# EAGLE board EyeTron (EAGLE 9.5.1)
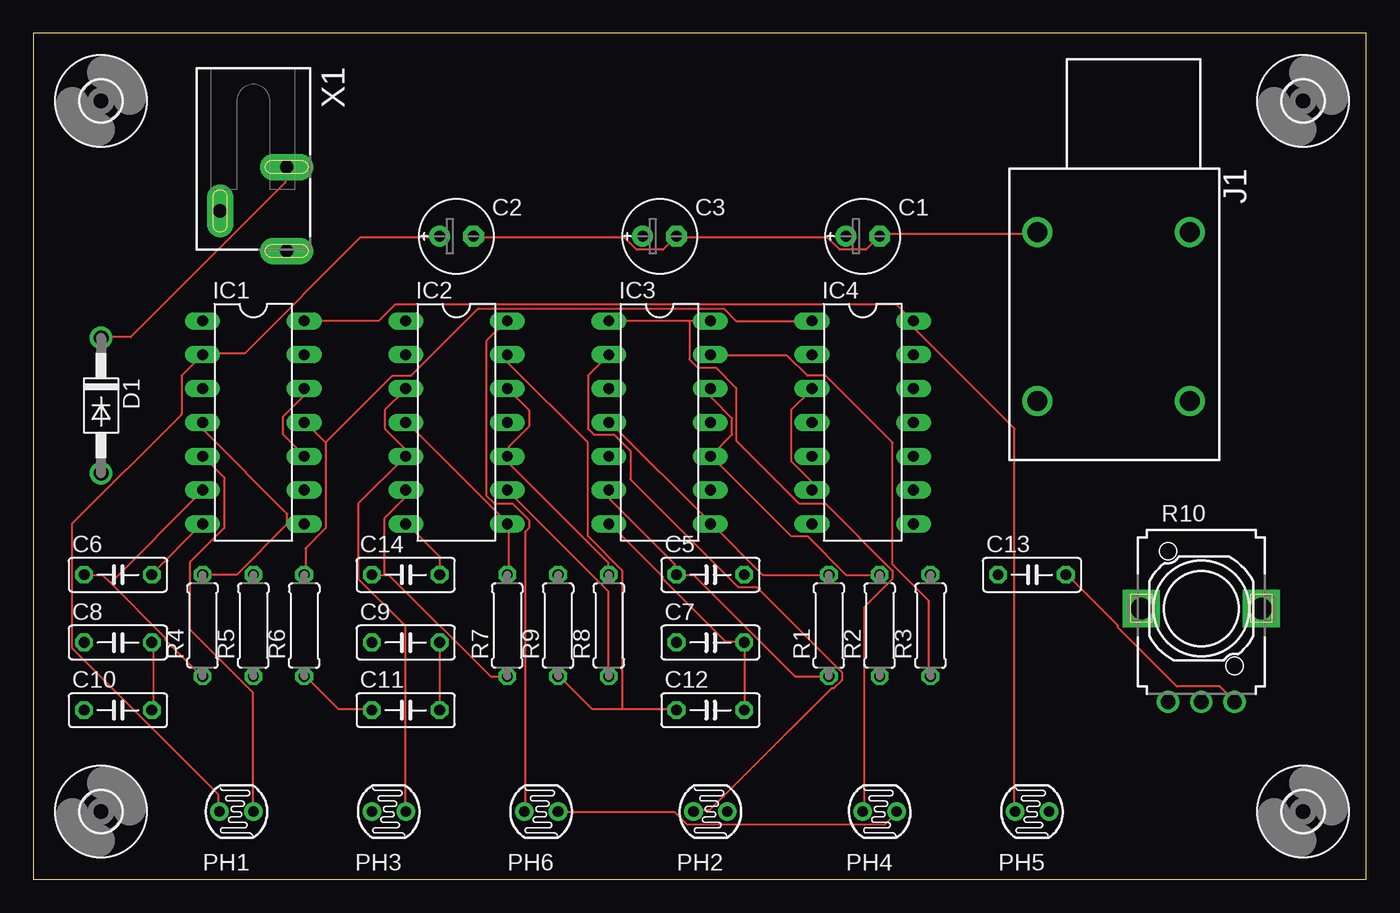
[diagram p0: board, top side]
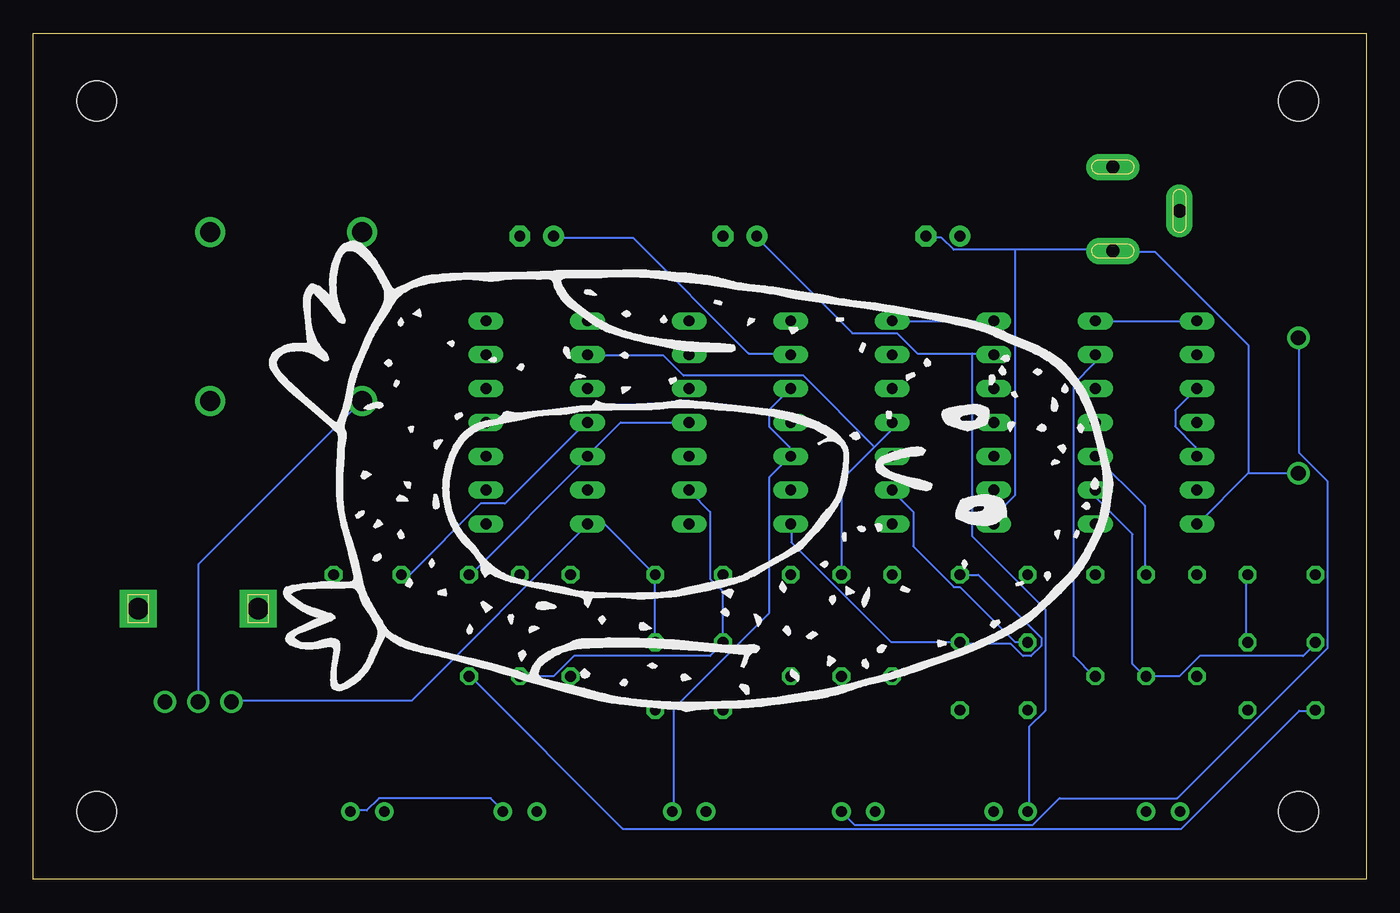
[diagram p1: board, bottom side, seen from below]

Size 100 x 63.49 mm. Coordinates in mm from the lower left corner, seen from the top.
Outline: 0,0 100,0 100,63.49 0,63.49 0,0
Copper layers (1*16): Top 0.035mm / dielectric 1.5mm / Bottom 0.035mm
Design rules "default": minimum track width 6mil, minimum drill 0.35mm, track to track 6mil, track to pad 6mil, pad to pad 6mil, via to via 6mil, smd to smd 6mil, copper to edge 40mil, drill to drill 6mil, minimum pad ring 10mil, minimum via ring 8mil, stop-mask expansion 4mil, vias tented up to drill 0mil, thermal gap 10mil

## Footprints (pad centres in the part's own frame; a part is rotated, then mirrored left to right if it is on the bottom)
E2,5-6E = drill 0.813 pad 1.575: + -1.27,0 | drill 0.813 pad 1.575 octagon: - 1.27,0
C050-025X075 = drill 0.813 octagon: 1 -2.54,0; 2 2.54,0
DO41-10 = drill 1.118: A 5.08,0; C -5.08,0
3,0 = hole 3: 0,0
DIL14 = drill 0.813 long: 1 -7.62,-3.81; 2 -5.08,-3.81; 3 -2.54,-3.81; 4 0,-3.81; 5 2.54,-3.81; 6 5.08,-3.81; 7 7.62,-3.81; 8 7.62,3.81; 9 5.08,3.81; 10 2.54,3.81; 11 0,3.81; 12 -2.54,3.81; 13 -5.08,3.81; 14 -7.62,3.81
NEUTRIK-NRJ4HM-1 = drill 1.5: S 7.23,4.75; SN -4.2,4.75; T 7.23,17.45; TN -4.2,17.45
VT900 = drill 0.8 pad 1.4: 1 -1.27,0; 2 1.27,0
0207/7 = drill 0.813 octagon: 1 -3.81,0; 2 3.81,0
EVUFXL = drill 1.1 pad 1.676: 1 -2.5,-7; 2 0,-7; 3 2.5,-7 | drill 1.6 pad 2.8 square: M1 4.5,0; M2 -4.5,0
SCD-014-A = drill 1 pad 2 long: 1 -2.5,13.8; 2 -2.5,7.5; 3 2.5,10.8

## Placement (x,y rotation side)
C1  100uf  [E2,5-6E]  62.23,48.26 0 top
C2  100uf  [E2,5-6E]  31.75,48.26 0 top
C3  100uf  [E2,5-6E]  46.99,48.26 0 top
C5  10uf  [C050-025X075]  50.8,22.86 0 top
C6  10uf  [C050-025X075]  6.35,22.86 0 top
C7  1uf  [C050-025X075]  50.8,17.78 0 top
C8  1uf  [C050-025X075]  6.35,17.78 0 top
C9  1uf  [C050-025X075]  27.94,17.78 0 top
C10  0.1uf  [C050-025X075]  6.35,12.7 0 top
C11  0.1uf  [C050-025X075]  27.94,12.7 0 top
C12  0.1uf  [C050-025X075]  50.8,12.7 0 top
C13  0.1uf  [C050-025X075]  74.93,22.86 0 top
C14  10uf  [C050-025X075]  27.94,22.86 0 top
D1  1N4001  [DO41-10]  5.08,35.56 270 top
H1  MOUNT-HOLE3.0  [3,0]  5.08,58.42 0 top
H2  MOUNT-HOLE3.0  [3,0]  5.08,5.08 0 top
H3  MOUNT-HOLE3.0  [3,0]  95.25,58.42 0 top
H4  MOUNT-HOLE3.0  [3,0]  95.25,5.08 0 top
IC1  4093N  [DIL14]  16.51,34.29 270 top
IC2  4093N  [DIL14]  31.75,34.29 270 top
IC3  4093N  [DIL14]  46.99,34.29 270 top
IC4  4077N  [DIL14]  62.23,34.29 270 top
J1  [NEUTRIK-NRJ4HM-1]  82.55,53.34 180 top
PH1  [VT900]  15.24,5.08 0 top
PH2  [VT900]  50.8,5.08 0 top
PH3  [VT900]  26.67,5.08 0 top
PH4  [VT900]  63.5,5.08 0 top
PH5  [VT900]  74.93,5.08 0 top
PH6  [VT900]  38.1,5.08 0 top
R1  22k  [0207/7]  59.69,19.05 90 top
R2  22k  [0207/7]  63.5,19.05 90 top
R3  22k  [0207/7]  67.31,19.05 90 top
R4  22k  [0207/7]  12.7,19.05 90 top
R5  22k  [0207/7]  16.51,19.05 90 top
R6  22k  [0207/7]  20.32,19.05 90 top
R7  22k  [0207/7]  35.56,19.05 90 top
R8  22k  [0207/7]  43.18,19.05 90 top
R9  22k  [0207/7]  39.37,19.05 90 top
R10  [EVUFXL]  87.63,20.32 0 top
X1  [SCD-014-A]  16.51,60.96 180 top

## Library data of the parts
C1-C3 C5-C14 = rcl; SPICEPREFIX: C
D1 = diode
H1-H4 = holes
IC1 IC2 IC4 = 40xx
IC3 = 40xx; SPICEPREFIX: J
J1 = Audio Jacks 0.25 inch
PH1-PH6 = photo-elements
R1-R9 = rcl; SPICEPREFIX: R
R10 = pot
X1 = con-shiua-chyuan; OC_FARNELL: unknown; OC_NEWARK: unknown

## Nets
N$1: IC1.11 IC4.1 R6.2
N$2: IC1.10 IC1.12 R5.2
N$3: IC1.4 IC1.8 R4.2
N$4: IC1.3 IC1.5 PH1.2
N$5: IC2.3 IC2.5 PH3.2
N$6: IC2.4 IC2.8 R7.2
N$7: IC2.10 IC2.12 R8.2
N$8: IC2.11 IC4.2 R9.2
N$9: IC4.3 IC4.6
N$10: IC3.3 IC3.5 PH2.2
N$11: IC3.4 IC3.8 R1.2
N$12: IC3.10 IC3.12 R2.2
N$13: IC3.11 IC4.5 R3.2
N$14: C1.+ IC3.2 PH2.1
N$15: C2.+ IC1.2 PH1.1
N$16: C3.+ IC2.2 PH3.1
N$17: C5.1 IC3.6 R1.1
N$19: C7.1 IC3.9 R2.1
N$20: IC3.1 IC3.14 PH4.1
N$21: C10.1 IC3.13 R3.1
N$22: IC1.1 IC1.14 IC4.14 PH5.1
N$23: C6.1 IC1.6 R4.1
N$24: C8.1 IC1.9 R5.1
N$25: C11.1 IC1.13 R6.1
N$26: C14.1 IC2.6 R7.1
N$27: C9.1 IC2.9 R8.1
N$28: C12.1 IC2.13 R9.1
N$29: IC2.1 IC2.14 PH6.1
N$30: D1.C PH4.2 PH5.2 PH6.2 X1.2
N$31: C13.1 IC4.4
N$32: C13.2 R10.3
N$33: J1.T R10.2
N$34: C1.- C2.- C3.- C5.2 C6.2 C7.2 C8.2 C9.2 C10.2 C11.2 C12.2 C14.2 D1.A IC1.7 IC2.7 IC3.7 IC4.7 J1.S R10.1 X1.1

## Tracks (layer width: path | path; a pad name or v marks a point on that pad's centre or on a via)
N$1
  Top 0.152: 21.95,32.77 21.95,26.36 20.42,24.84 20.42,22.86 R6.2 | 21.95,32.77 20.42,34.29 IC1.11 | IC4.1 52.73,41.91 51.82,42.82 33.38,42.82 28.35,37.8 26.98,37.8 21.95,32.77
N$2
  Top 0.152: IC1.12 20.27,36.73 20.27,36.27 18.75,34.75 18.75,33.38 20.27,31.85 IC1.10
  Bottom 0.152: IC1.10 16.61,28.04 16.61,22.86 R5.2
N$3
  Top 0.152: R4.2 15.24,22.86 19.05,26.67 | 19.05,26.67 IC1.8 20.27,26.67 | 19.05,26.67 19.05,27.43 12.8,33.68 12.8,34.29 IC1.4
N$4
  Top 0.152: PH1.2 16.46,5.18 16.46,14.02 11.73,18.75 11.73,23.77 14.33,26.36 14.33,30.18 12.8,31.7 IC1.5
  Bottom 0.152: IC1.3 14.33,35.2 14.33,33.98 12.8,32.46 12.8,31.85 IC1.5
N$5
  Top 0.152: IC2.3 27.89,36.73 26.36,35.2 26.36,33.83 27.89,32.31 27.89,31.85 IC2.5 24.38,28.19 24.38,22.55 27.89,19.05 27.89,5.18 PH3.2
N$6
  Top 0.152: 35.66,26.67 35.66,22.86 R7.2 | 35.66,26.67 28.04,34.29 IC2.4 | 35.66,26.67 IC2.8
N$7
  Top 0.152: IC2.12 37.19,35.2 37.19,33.98 35.66,32.46 35.66,31.85 IC2.10 35.66,31.7 35.66,31.24 43.13,23.77 43.13,22.86 R8.2
N$8
  Bottom 0.152: 36.88,32.46 39.32,30.02 39.32,22.86 R9.2 | 36.88,32.46 35.66,33.68 35.66,34.29 IC2.11 | 36.88,32.46 42.22,37.8 51.21,37.8 52.73,39.32 58.37,39.32 IC4.2
N$9
  Top 0.152: IC4.6 58.37,29.26 58.37,29.87 56.84,31.39 56.84,35.2 58.37,36.73 IC4.3
N$10
  Bottom 0.152: IC3.3 44.81,35.2 44.81,33.98 43.28,32.46 43.28,31.85 IC3.5 43.28,31.7 44.81,30.18 44.81,19.96 51.97,12.8 51.97,5.18 PH2.2
N$11
  Top 0.152: 50.9,26.67 43.28,34.29 IC3.4 | R1.2 54.71,22.86 50.9,26.67 | 50.9,26.67 IC3.8
N$12
  Top 0.152: R2.2 60.96,22.86 58.06,25.76 56.84,25.76 50.9,31.7 IC3.10 52.43,33.38 52.43,34.59 50.9,36.12 50.9,36.73 IC3.12
N$13
  Bottom 0.152: R3.2 67.21,22.86 58.37,31.7 IC4.5 58.37,31.85 55.93,34.29 IC3.11
N$14
  Top 0.152: IC3.2 41.6,37.8 41.6,33.83 42.06,33.38 43.59,33.38 44.81,32.16 44.81,30.02 52.88,21.95 54.25,21.95 60.66,15.54 60.66,14.94 60.05,14.33 59.89,14.33 50.75,5.18 49.53,5.18 PH2.1
  Bottom 0.152: IC3.2 43.28,39.47 46.33,39.47 55.02,48.16 60.96,48.16 C1.+
N$15
  Top 0.152: C2.+ 30.48,48.16 24.54,48.16 15.85,39.47 12.8,39.47 IC1.2 11.12,37.8 11.12,34.9 2.9,26.67 2.9,17.37 13.87,6.4 13.87,5.18 PH1.1
N$16
  Bottom 0.152: 29.57,39.47 33.68,39.47 35.2,41 38.56,41 45.72,48.16 C3.+ | 29.57,39.47 28.04,39.47 IC2.2 | 29.57,39.47 29.57,25.76 24.08,20.27 24.08,12.65 25.3,11.43 25.3,5.18 PH3.1
N$17
  Top 0.152: IC3.6 43.28,29.11 43.28,28.5 48.16,23.62 48.16,22.86 C5.1 49.53,22.86 57.15,15.24 R1.1
N$19
  Bottom 0.152: IC3.9 50.75,29.11 49.23,27.58 49.23,22.55 48.31,21.64 48.31,17.83 C7.1 48.31,17.68 49.23,16.76 59.44,16.76 60.96,15.24 R2.1
N$20
  Top 0.152: IC3.14 49.23,41.91 | 49.23,41.91 IC3.1 | 49.23,41.91 49.23,39.01 49.84,38.41 51.21,38.41 52.73,36.88 52.73,32.92 57.45,28.19 59.44,28.19 64.47,23.16 64.47,22.55 62.33,20.42 62.33,5.18 PH4.1
N$21
  Top 0.152: IC3.13 50.9,39.32 56.54,39.32 58.06,37.8 59.44,37.8 64.47,32.77 64.47,23.62 67.21,20.88 67.21,15.24 R3.1
  Bottom 0.152: C10.1 3.81,12.65 5.03,12.65 13.87,3.81 55.78,3.81 67.21,15.24 R3.1
N$22
  Top 0.152: PH5.1 73.61,5.18 73.61,33.83 66.14,41.3 66.14,41.91 IC4.14 65.99,41.91 64.77,43.13 27.13,43.13 25.91,41.91 IC1.14
  Bottom 0.152: IC1.14 IC1.1
N$23
  Top 0.152: 5.79,22.25 5.18,22.86 C6.1 | 5.79,22.25 9.91,18.14 9.91,17.98 12.65,15.24 R4.1 | 5.79,22.25 12.65,29.11 IC1.6
N$24
  Bottom 0.152: C8.1 3.81,17.68 4.72,16.76 12.5,16.76 14.02,15.24 R5.1 16.61,15.24 17.53,16.15 17.53,25.91 20.27,28.65 20.27,29.11 IC1.9
N$25
  Top 0.152: C11.1 25.3,12.8 22.86,12.8 20.42,15.24 R6.1
  Bottom 0.152: IC1.13 20.42,39.32 20.42,38.71 21.95,37.19 21.95,16.76 20.42,15.24 R6.1
N$26
  Top 0.152: R7.1 34.29,15.24 26.67,22.86 26.36,22.86 | C14.1 26.36,22.86 | 26.36,22.86 26.36,27.13 27.89,28.65 27.89,29.11 IC2.6
N$27
  Top 0.152: IC2.9 43.13,21.64 43.13,15.24 R8.1
  Bottom 0.152: C9.1 25.45,17.83 26.36,17.83 30.48,21.95 30.94,21.95 33.98,24.99 33.98,27.58 35.51,29.11 IC2.9
N$28
  Top 0.152: 44.2,12.8 41.91,12.8 39.47,15.24 R9.1 | 44.2,12.8 48.16,12.8 C12.1 | 44.2,12.8 44.2,23.16 41.6,25.76 41.6,32.77 35.66,38.71 35.66,39.32 IC2.13
N$29
  Top 0.152: PH6.1 36.88,5.18 36.88,26.06 37.19,26.36 37.19,26.98 35.97,28.19 34.59,28.19 33.98,28.8 33.98,40.39 35.51,41.91 IC2.14
  Bottom 0.152: IC2.14 IC2.1
N$30
  Top 0.152: D1.C 5.18,40.69 7.32,40.69 18.9,52.27 18.9,53.34 X1.2 | PH6.2 39.47,5.03 48.16,5.03 49.07,4.12 63.86,4.12 64.77,5.03 PH4.2
  Bottom 0.152: PH5.2 76.2,5.18 74.98,5.18 74.07,6.1 65.68,6.1 64.77,5.18 PH4.2 | PH6.2 38.41,4.12 24.99,4.12 23.01,6.1 14.17,6.1 2.9,17.37 2.9,29.87 5.03,32 5.03,40.54 D1.C
N$31
  Bottom 0.152: C13.1 71.78,22.86 66.45,28.19 64.62,28.19 58.52,34.29 IC4.4
N$32
  Top 0.152: C13.2 77.57,22.86 81.38,19.05 81.38,18.9 85.8,14.48 89,14.48 90.07,13.41 R10.3
N$33
  Bottom 0.152: R10.2 87.63,23.62 75.44,35.81 J1.T
N$34
  Top 0.152: C9.2 C11.2 | C14.2 30.48,24.23 28.04,26.67 IC2.7 | C12.2 C7.2 53.34,17.83 51.97,17.83 47.24,22.55 47.24,22.71 43.28,26.67 IC3.7 | C10.2 8.99,12.8 8.99,17.68 C8.2 | IC1.7 12.65,26.67 8.84,22.86 C6.2 | J1.S 75.29,48.46 63.7,48.46 C1.- 62.48,47.24 60.5,47.24 59.59,48.16 48.31,48.16 C3.- 47.24,47.24 45.26,47.24 44.35,48.16 33.07,48.16 C2.-
  Bottom 0.152: C14.2 29.11,22.86 24.38,18.14 24.38,17.53 25.15,16.76 25.76,16.76 26.67,17.68 30.48,17.68 C9.2 30.48,17.83 35.66,17.83 43.13,25.3 43.13,26.67 IC3.7 | C7.2 C5.2 57.15,26.67 58.37,26.67 | 58.37,26.67 71.63,13.41 85.04,13.41 R10.1 | 58.37,26.67 IC4.7 | C6.2 8.99,22.86 8.99,17.83 C8.2 | 8.84,30.48 D1.A | 8.84,30.48 12.65,26.67 IC1.7 | 26.36,47.24 19.05,47.24 X1.1 18.9,47.09 15.85,47.09 8.84,40.08 8.84,30.48 | 26.36,47.24 30.94,47.24 31.85,48.16 32.92,48.16 C2.- | 26.36,47.24 26.36,28.8 27.89,27.28 27.89,26.67 IC2.7

## Text on the board
tValues: VauxFlores | EyeTron